# Altium PCB Analog temperature sensor.PcbDoc
Units mil, origin at the board's own origin, x right, y up, seen from the top; angles counter-clockwise.
Board outline 2560 x 1975 mil, 2 copper layers (Top Layer, Bottom Layer); 17 components, 13 nets, 51 pads, 6 vias.
Unrouted connection lines stored in the file: 9.
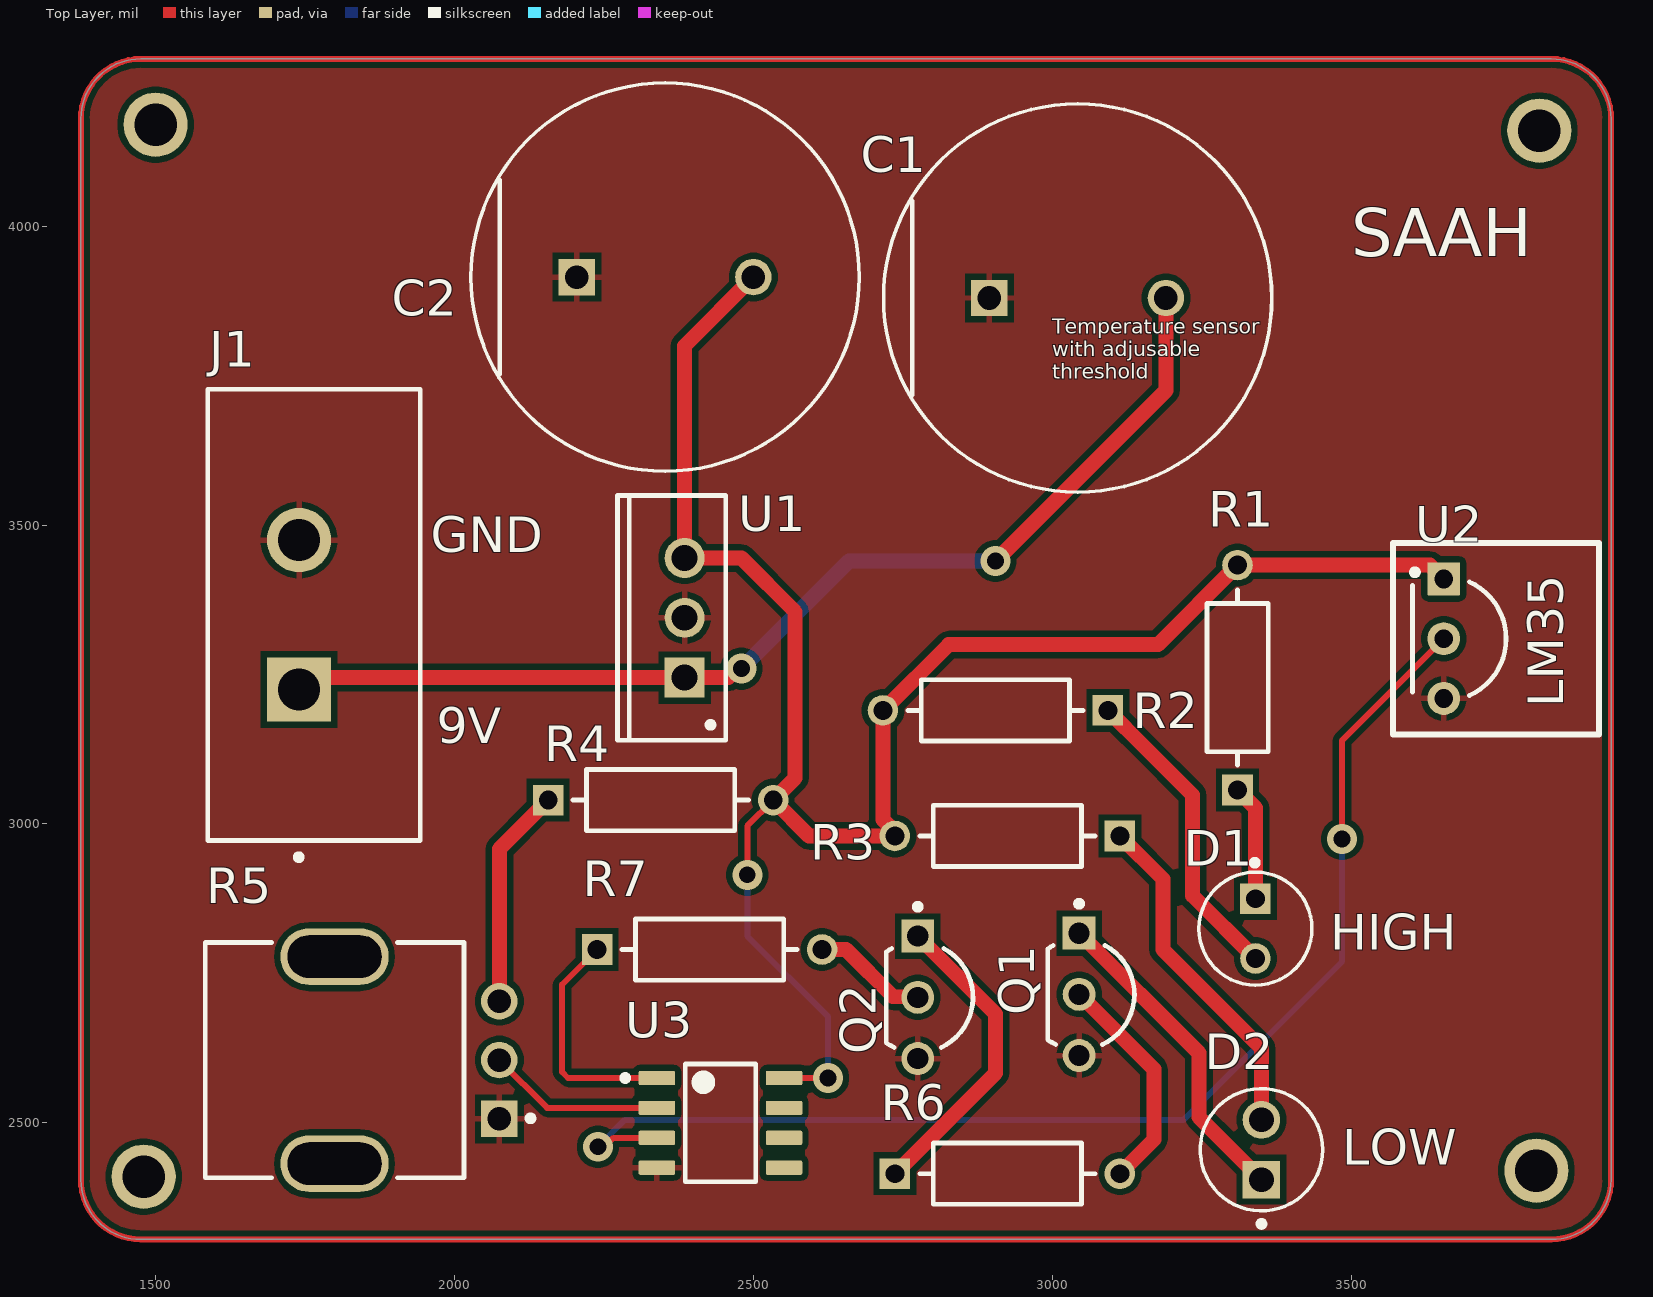
[diagram p0: Top Layer view]
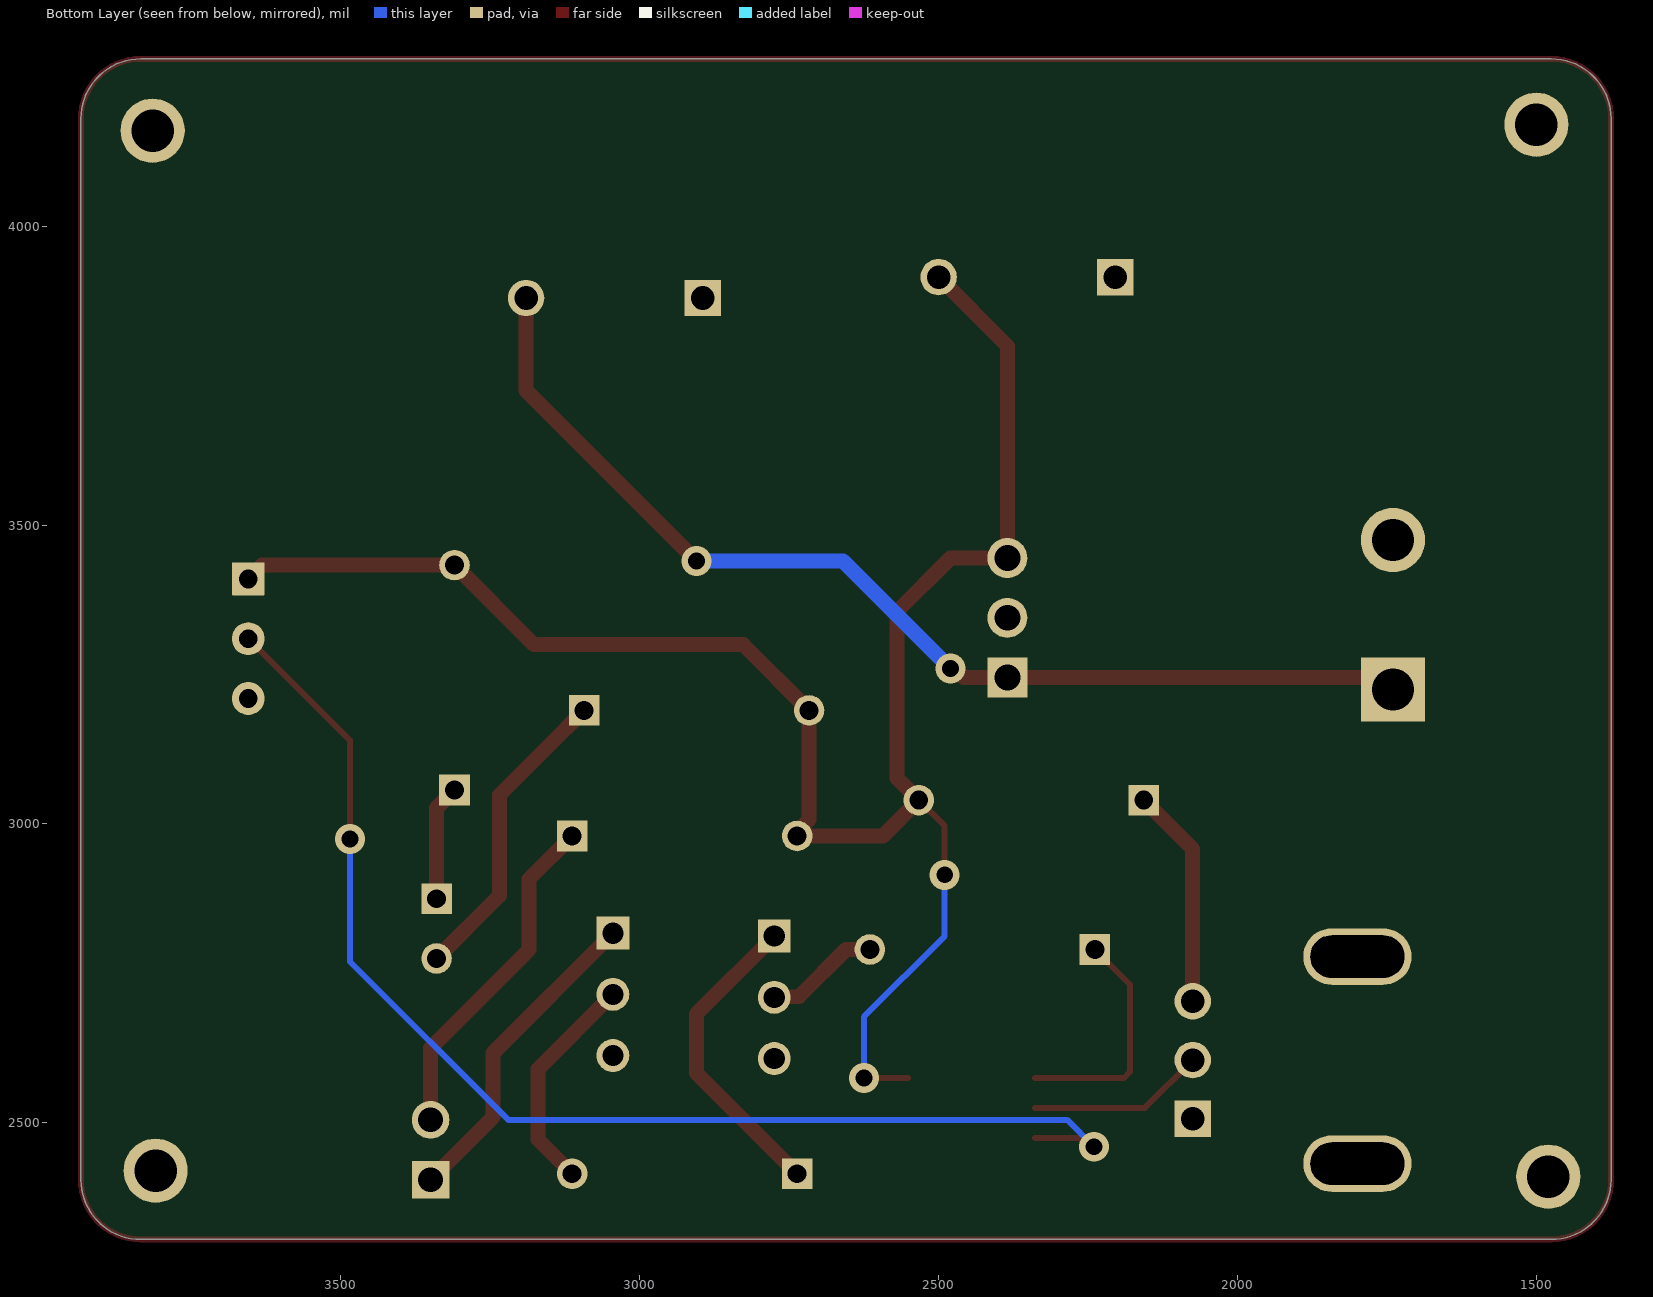
[diagram p1: Bottom Layer view, seen from below]
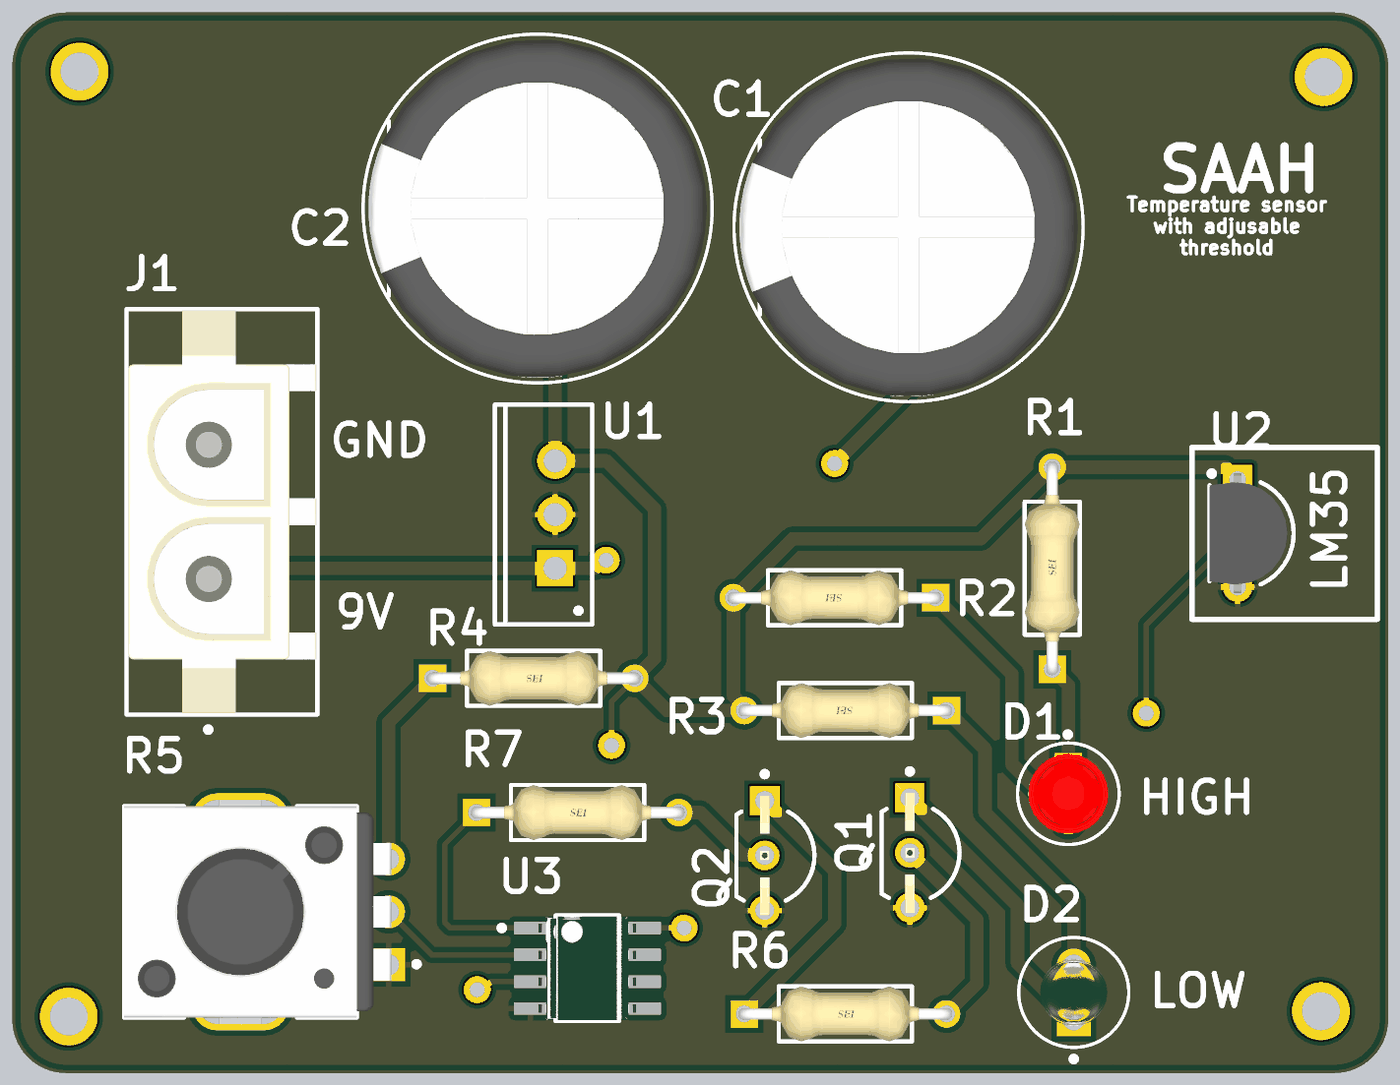
[diagram p2: 3D render of the assembled board from above, using the file's embedded part models]

## Layer stack, top to bottom
Top Solder: solder mask 0.4, Solder Resist, Dk 3.5
Top Layer: signal copper 1.4
Dielectric 1: dielectric 12.6, FR-4, Dk 4.8
Bottom Layer: signal copper 1.4
Bottom Solder: solder mask 0.4, Solder Resist, Dk 3.5

## Board outline
1375,2405 1375,4180 cw(c1475,4180) 1475,4280 3835,4280 cw(c3835,4180) 3935,4180 3935,2405 cw(c3835,2405) 3835,2305 1475,2305 cw(c1475,2405)

## Design rules (kind name [scope] priority, off if disabled: settings)
Clearance [All] p1: gap=10 ignorepadtopadclearanceinfootprint=FALSE
PolygonConnect [All] p1: connectstyle=Relief reliefconductorwidth=10 reliefentries=4 polygonreliefangle="90 Angle" airgapwidth=10
RoutingVias [All] p1: holewidth=28 width=50 viastyle="Through Hole" minholewidth=28 minwidth=50 maxholewidth=28 maxwidth=50
SolderMaskExpansion [All] p1: expansion=4 istentingtop=FALSE
SupplyNets "Schematic Supply Nets_1" [InNet('VCC')] p1: voltage=0.000
SupplyNets "Schematic Supply Nets" [InNet('GND')] p2: voltage=0.000
Width [All] p1: maxlimit=30 minlimit=10 preferedwidth=10 minimp=50.000000 maximp=50.000000 favimp=50.000000
30 further rules are at their usual default settings.

## Components (designator, comment, footprint, x,y, rotation, side; value= is the part's Value field where it differs from the comment)
C1 "0.33uF" FP-RAD-TH-D_16_0_5-L_25_2-MFG 3042.64,3880 r0 top
C2 "0.1uF" FP-RAD-TH-D_16_0_5-L_25_2-MFG 2352.36,3915 r0 top
D1 "LTL-1CHEE" FP-LTL-1CHEE-MFG 3340,2825 r270 top
D2 "TLLG4400" FP-6_544-5255_01-4-MFG 3350,2455 r90 top
J1 "350428-1" FP-350428-1-MFG 1765,3350 r90 top
Q1 "BC547BRL1G" ONSC-TO-92-3-29-11_AM_BL 3045,2715 r270 top
Q2 "BC547BRL1G" ONSC-TO-92-3-29-11_AM_BL 2775,2710 r270 top
R1 "1k" FP-CF14-MFG 3310,3245 r90 top
R2 "1k" FP-CF14-MFG 2905,3190 r180 top
R3 "1k" FP-CF14-MFG 2925,2980 r180 top
R4 "10k" FP-CF14-MFG 2345,3040 r0 top
R5 "PTV09A-4225F-B103" FP-PTV09A-4-MFG 1799.41,2605 r90 top
R6 "10k" FP-CF14-MFG 2925,2415 r0 top
R7 "10k" FP-CF14-MFG 2426.81,2790 r0 top
U1 "L7805CV" TO220 2385,3345 r90 top
U2 "LM35CAZ/NOPB" LP0003A 3655,3310 r0 top
U3 "LM358DR" FP-D0008A-MFG 2445,2500 r0 top

## Footprints (in the part's own frame and the unit in brackets; to place one, negate y for a bottom-side part, rotate by r counter-clockwise, add the part's x,y. Pads: shape width x height; smd on the part's side, far side on the other; paste and mask are expansions set on the pad)
FP-6_544-5255_01-4-MFG [mm]
  rect 1.6x1.6 hole 1.05 paste-2539.97 mask+0: 1(-1.27,0)
  round 1.6 hole 1.05 paste-2539.97 mask+0: 2(1.27,0)
  silkscreen extent -3.27,-2.6 2.6,2.6, body extent -2.32,-2.32 2.32,2.32, height 0.25
FP-350428-1-MFG [mm]
  rect 2.73x2.73 hole 1.78 paste-2539.97 mask+0: 1(-3.175,0.635)
  round 2.73 hole 1.78 paste-2539.97 mask+0: 2(3.175,0.635)
  silkscreen extent -10.42,-4.51 9.59,4.51, body extent -9.69,-4.61 9.69,4.61, height 0.25
FP-CF14-MFG [mm]
  rect 1.3x1.3 hole 0.8 paste-2539.97 mask+0: 1(-4.78,0)
  round 1.3 hole 0.8 paste-2539.97 mask+0: 2(4.78,0)
  silkscreen extent -3.73,-1.3 3.73,1.3, body extent -5.53,-1.4 5.53,1.4, height 0.25
FP-D0008A-MFG [mm]
  rrect17% 1.55x0.6 smd paste+0 mask+0: 1(-2.7,1.905) 2(-2.7,0.635) 3(-2.7,-0.635) 4(-2.7,-1.905) 5(2.7,-1.905) 6(2.7,-0.635) 7(2.7,0.635) 8(2.7,1.905)
  silkscreen extent -4.17,-2.5 1.5,2.5, body extent -3.57,-2.75 3.57,2.75, height 0.25
FP-LTL-1CHEE-MFG [mm]
  rect 1.3x1.3 hole 0.8 paste-2539.97 mask+0: 1(-1.27,0)
  round 1.3 hole 0.8 paste-2539.97 mask+0: 2(1.27,0)
  silkscreen extent -2.92,-2.4 2.4,2.4, body extent -2.15,-2.15 2.15,2.15, height 0.25
FP-PTV09A-4-MFG [mm]
  rect 1.55x1.55 hole 1 paste-2539.97 mask+0: 1(-2.5,-7)
  round 1.55 hole 1 paste-2539.97 mask+0: 2(0,-7) 3(2.5,-7)
  rrect100% 2.4x4.6 hole 4 slot 1.8 at 0 deg paste-2539.97 mask+0: 4(-4.4,0) 5(4.4,0)
  silkscreen extent -5,-8.45 5,5.5, body extent -5.8,-7.88 5.8,5.6, height 0.25
FP-RAD-TH-D_16_0_5-L_25_2-MFG [mm]
  rect 1.55x1.55 hole 1 paste-2539.97 mask+0: 1(-3.75,0)
  round 1.55 hole 1 paste-2539.97 mask+0: 2(3.75,0)
  silkscreen extent -8.25,-8.25 8.25,8.25, body extent -8.35,-8.35 8.35,8.35, height 0.25
LP0003A [mm] "TO, Flat Index; 3 In-Line, Formed Axial Leads; Body Dia. 4.8mm; Leads 0.56 x 0.41 mm (max)"
  rrect7% 1.4x1.4 hole 0.8: 1(0,2.54)
  round 1.4 hole 0.8: 2(0,0) 3(0,-2.54)
  silkscreen extent -1.35,-2.41 2.65,2.95, body extent -1.33,-2.83 2.35,2.83, height 9.01
ONSC-TO-92-3-29-11_AM_BL [mm] "TO, 3-Leads, Body Dia 4.7mm, Pitch 2.6mm"
  rect 1.4x1.4 hole 0.9: 1(-2.6,0)
  round 1.4 hole 0.9: 2(0,0) 3(2.6,0)
  silkscreen extent -3.97,-1.34 2.13,2.35, body extent -2.84,-1.34 2.84,2.35, height 5.33
TO220 [mm] "TO, Thru-Hole, Vertical, Heatsink Mounted; 3 In-Line Leads; Pitch 2.54 mm"
  rect 1.7x1.7 hole 1.1: 1(-2.54,0)
  round 1.7 hole 1.1: 2(0,0) 3(2.54,0)
  silkscreen extent -5.2,-1.75 5.2,2.85, body extent -5.25,-1.8 5.25,2.9, height 19.7

## Part data
C1 C2: library part CMP-05427-001116-1, "Aluminum Electrolytic Capacitors (Radial Lead Type) 47uF ±20% 400V", Capacitance=47uF, Case/Package=Radial, Dielectric Material=Aluminium, Leakage Current=1.138mA, Max Operating Temperature=105°C, Min Operating Temperature=-25°C, Package Quantity=100, Ripple Current=1.18A, Tolerance=20%, Voltage=400V, Construction=RADIAL, Diameter=16mm, Dissipation Factor=0.24%, Height=25mm, Height - Seated (Max)=0.984inch, Lead Diameter=0.8mm, Lead Free="Lead Free", Lead Pitch=7.5mm, Length=25mm, Life (Hours)=10000Hour, Mount="Through Hole", Number of Pins=2, Packaging=Bulk, Radiation Hardening=No, REACH SVHC="No SVHC", Ripple Current (AC)=1.18A, RoHS Compliant=Yes, Series=EE, Termination=Radial, Voltage Rating=400V, Voltage Rating (DC)=400V
D1: library part CMP-22017-000040-1, "LED RED CLEAR T/H", Case/Package=T, Color=Red, Forward Current=30mA, Forward Voltage=2V, Max Operating Temperature=100°C, Max Power Dissipation=100mW, Min Operating Temperature=-55°C, Package Quantity=1000, Reverse Voltage=5V, Test Current=10mA, Depth=3.8mm, Diameter=3.1mm, Dominant Wavelength=625nm, Height=5.2mm, Illumination Color=Red, Lead Free="Lead Free", Length=3.8mm, Lens Color=Red, Lens Style=Dome, Lens Transparency=Clear, Luminous Intensity=19mcd, Mount="Through Hole", Number of Elements=1, Number of LEDs=1, Number of Pins=2, Packaging=Bulk, Power Dissipation=100mW, Radiation Hardening=No, RoHS Compliant=Yes, Series=-, Viewing Angle=45°, Wavelength=635nm, Width=3.8mm
D2: library part CMP-00030-55433990-1, "TLLG4400 Led, Pcb, Green, 0.63MCD, 3MM, T-1, 7MA, 1.9V, 565NM, 25DEG, 20V, 20MW, -40", Case/Package=T, Color=Green, Forward Current=2mA, Forward Voltage=1.9V, Max Operating Temperature=100°C, Max Power Dissipation=20mW, Min Operating Temperature=-40°C, Reverse Voltage=20V, Voltage Rating (DC)=2.4V, Depth=3.2mm, Dominant Wavelength=575nm, Height=4.5mm, Illumination Color=Green, Length=3.2mm, Lens Color=Green, Lens Size=3mm, Lens Style="Circular, Colored, Diffused, Dome, Round", Lens Transparency=Diffused, Luminous Intensity=1.2mcd, Mount="Through Hole", NexarPartId=55433990, Number of Elements=1, Number of LEDs=1, Number of Pins=2, Power Dissipation=20mW, Radiation Hardening=No, REACH SVHC=Unknown, RoHS=Compliant, Schedule B="8541402000, 8541402000", Test Current=2mA, Viewing Angle=50°, Wavelength=575nm
J1: library part CMP-03369-000080-1, "CONN HEADER VERT 2POS 6.35MM", Current Rating=12A, Manufacturer="TE Connectivity", Temperature="-40°C to +105°C", Temperature Range High=+105°C, Temperature Range Low=-40°C, Voltage Rating=600V, Automotive=No, Category=Conn, ComponentLink2Description=Datasheet, ComponentLink2URL=https://www.te.com/commerce/DocumentDelivery/DDEController?Action=showdoc&DocId=Customer+Drawing%7F350428%7FY2%7Fpdf%7FEnglish%7FENG_CD_350428_Y2.pdf%7F350428-1, Conn Gender=Male, Conn Orientation=Vertical, Contact Material=Gold,Nickel, Device Class L1=Connectors, Device Class L2="Headers and Wire Housings", Device Class L3=unset, Digikey Description="CONN HEADER VERT 2POS 6.35MM", Height=14.99mm, Lead Free=Yes, Manufacturer Part Number=350428-1, Mouser Description="Connector, Soft Shell; Universal MATE-N-LOK; 2; Nylon; Natural; 19 A; 600 VAC", Number Of Contacts=2, Number Of Rows=1, Octopart=https://octopart.com/350428-1-te+connectivity-46505355, Package=350428-1, Pitch=6.35mm, RoHS=TRUE, Standoff Height=0.63mm
Q1 Q2: library part CMP-1048-01605-1, "Amplifier Transistor, NPN Silicon, 3-Pin TO-92, Pb-Free, Tape and Reel", Manufacturer="On Semiconductor", ComponentLink1Description="Manufacturer URL", ComponentLink1URL=http://www.onsemi.com/, ComponentLink2Description=Datasheet, ComponentLink2URL=http://www.onsemi.com/pub_link/Collateral/BC546-D.PDF, ComponentLink3Description="Package Specification", ComponentLink3URL=http://www.onsemi.com/pub_link/Collateral/MAC97-D.PDF, DatasheetVersion="Rev. 7", fT Min (MHz)=150, IC Continuous (A)=0.1, Mounting Technology="Through Hole", PackageDescription="3-Pin Transistor Outline, Body 4.825 x 3.685 mm, Pitch 1.27 mm", PackageReference=TO-92-3-29-11_AM_BL, PackageVersion="Rev. AM", Packing="Tape and Reel", PartNumber=BC547BRL1G, Polarity=NPN, RoHS=TRUE
R1 R2 R3 R4 R6 R7: library part CMP-26528-000003-1, "RES 7.5K OHM 1/4W 5% AXIAL", Case/Package=Axial, Max Operating Temperature=155°C, Max Power Dissipation=250mW, Min Operating Temperature=-55°C, Resistance=7.5kR, Resistor Type="Carbon Film", Temperature Coefficient=-400ppm/°C, Tolerance=5%, Contact Plating=Tin, Diameter=2.3mm, Features="Flame Retardant Coating", Lead Free="Lead Free", Length=0.256inch, Mount="Through Hole", Number of Terminations=2, Packaging="Tape and Reel", Power Rating=250mW, Radiation Hardening=No, RoHS Compliant=Yes, Series=CF
R5: library part CMP-07234-000052-1, "POT 10K OHM 1/20W CARBON LINEAR", Max Operating Temperature=50°C, Max Power Dissipation=50mW, Min Operating Temperature=-10°C, Package Quantity=100, Resistance=10kR, Resistance Tolerance=20%, Resistor Type=Carbon, Actuator Diameter=0.236inch, Actuator Length=0.984inch, Depth=12.5mm, Height=12.5mm, Hole Diameter=9.1mm, Length=11.4mm, Military Standard=Not, Mount="Through Hole", Number of Gangs=1, Number of Turns=1, Packaging=Bulk, Power Rating=50mW, Radiation Hardening=No, REACH SVHC="No SVHC", RoHS Compliant=Yes, Series="Pro Audio PTV09", Taper=Linear, Technology="CARBON FILM", Termination=PCB, Tolerance=20%, Type=Potentiometer
U1: library part CMP-0244-00483-1, "Positive Voltage Regulator, 5V, 3-Pin TO-220", ComponentLink1Description="Manufacturer URL", ComponentLink1URL=http://www.st.com, ComponentLink2Description=Datasheet, ComponentLink2URL=http://www.st.com/internet/com/TECHNICAL_RESOURCES/TECHNICAL_LITERATURE/DATASHEET/CD00000444.pdf, ComponentLink3Description="Package Specification", ComponentLink3URL=http://www.st.com/internet/com/TECHNICAL_RESOURCES/TECHNICAL_LITERATURE/PACKAGE_INFORMATION/CD00004649.pdf, DatasheetVersion=16/11/2011, PackageDescription="TO, Thru-Hole, Vertical, Heatsink Mounted; 3 In-Line Leads; Pitch 2.54 mm", PackageReference=TO220, PackageVersion=ver3.0
U2: library part CMP-0066-00028-3, "Precision Centigrade Temperature Sensor, 3-pin TO-92, Pb-Free", Manufacturer="Texas Instruments", PackageTopMarking=NSXYTT*LM35*CAZ, PowerWise=N, Code_JEDEC=TO-226-AA, ComponentLink1Description="Datasheet URL", ComponentLink1URL=http://www.ti.com/general/docs/lit/getliterature.tsp?genericPartNumber=LM35&fileType=pdf, CompType="Temp Sensor IC", PackageDescription="TO-92, Molded, 3 Lead", PackageReference=LP0003A, PinCount=3, RoHS=Y
U3: library part CMP-1685-00009-2, "IC OPAMP GP 2 CIRCUIT 8SOIC", Case/Package=SOIC, Dual Supply Voltage=9V, Input Bias Current=250nA, Input Offset Voltage (Vos)=7mV, Max Dual Supply Voltage=16V, Max Operating Temperature=70°C, Max Supply Voltage=32V, Min Dual Supply Voltage=1.5V, Min Operating Temperature=0°C, Min Supply Voltage=3V, Nominal Supply Current=1.2mA, Operating Supply Current=1mA, Output Current=30mA, Package Quantity=2500, Power Supply Rejection Ratio (PSRR)=65dB, Voltage Gain=100dB, Bandwidth=700kHz, Common Mode Rejection Ratio=65dB, Contact Plating=Gold, Gain Bandwidth Product=700kHz, Height=1.58mm, Lead Free="Lead Free", Length=4.9mm, Mount="Surface Mount", Number of Amplifiers=2, Number of Channels=2, Number Of Circuits=2, Number of Elements=2, Number of Pins=8, Operating Supply Voltage=16V, Output Current per Channel=30mA, Packaging="Tape and Reel", Radiation Hardening=No, REACH SVHC="No SVHC", Slew Rate=0.3V/µs, Unity Gain Bandwidth Product=700kHz, Width=3.91mm

## Free pads (board coordinates)
  round 107.48 hole 70.71: 2(1500,4170) 3(3815,4160) 4(3810,2420) 5(1480,2410)

## Via types
v1: diameter 50, hole 28, Top Layer to Bottom Layer, 6 vias

## Nets (pads, with @x,y where several pads share a name; then routed paths per layer and width w, separated by ;. In a path a pad name is that pad's centre, name@x,y a point inside that pad or via, vN(x,y) a via of type N, cw(c..) or ccw(c..) an arc to the next point about the centre after c; other vN are vias at no path point)
GND: C1.1 C2.1 J1.2 Q1.3 Q2.3 R5.1 U1.2 U2.3 U3.4
NetC2_2: C2.2 R1.2 R2.2 R3.2 R4.2 U1.3 U2.1 U3.8 | length 3178
  Top Layer w10: v1(2490,2915) 2490,2996.81 R4.2 ; U3.8 v1(2625,2575)
  Top Layer w25: C2.2 2385,3800 U1.3 2480,3445 2570,3355 2570,3076.81 R4.2 2593.19,2980 R3.2 2736.81,2987.08 2716.81,3007.08 R2.2 2826.81,3300 3176.81,3300 R1.2 3631.81,3433.19 U2.1
  Bottom Layer w10: v1(2490,2915) 2490,2812.5 2625,2677.5 v1(2625,2575)
NetD1_1: D1.1 Q2.1 R1.1 R6.1 | length 715.1
  Top Layer w25: R6.1 2905,2583.19 2905,2682.36 Q2.1 ; R1.1 3340,3026.81 D1.1
NetD1_2: D1.2 R2.1 | length 517.2
  Top Layer w25: R2.1 3154.73,3128.45 3235,3048.19 3235,2880 D1.2
NetD2_1: D2.1 Q1.1 | length 538.7
  Top Layer w25: Q1.1 3245.5,2616.86 3245.5,2509.5 D2.1
NetD2_2: D2.2 R3.1 | length 573.1
  Top Layer w25: R3.1 3185,2908.19 3185,2790 3350,2625 D2.2
NetQ1_2: Q1.2 R6.2 | length 375.3
  Top Layer w25: Q1.2 3170,2590 3170,2471.81 R6.2
NetQ2_2: Q2.2 R7.2 | length 193.1
  Top Layer w25: R7.2 2655,2790 2734,2711 2774,2711 Q2.2
NetR4_1: R4.1 R5.3 | length 370.5
  Top Layer w25: R5.3 2075,2958.19 R4.1
NetR5_2: R5.2 U3.2 | length 296.8
  Top Layer w10: R5.2 2155,2525 U3.2
NetR7_1: R7.1 U3.1 | length 392.1
  Top Layer w10: R7.1 2180,2731.38 2180,2585 2190,2575 U3.1
NetU2_2: U2.2 U3.3 | length 2099.6
  Top Layer w10: v1(2240,2460) 2250.82,2460 2265.82,2475 U3.3 ; v1@3495.82,2975 v1(3485,2975) 3485,3140 U2.2
  Bottom Layer w10: v1(2240,2460) 2285,2505 3220,2505 3485,2770 v1(3485,2975)
VCC: C1.2 J1.1 U1.1 | length 1812.2
  Top Layer w25: J1.1 1760,3245 U1.1 2458.24,3245 2473.24,3260 v1(2480,3260) ; v1(2905,3440) 3190.28,3725.28 C1.2
  Bottom Layer w25: v1(2480,3260) 2660,3440 v1(2905,3440)
pads on no net: R5.4 R5.5 U3.5 U3.6 U3.7
copper on no net: | length 8898.3
  Top Layer w10: 1375,2405 ccw(c1475,2405) 1475,2305 3835,2305 ccw(c3835,2405) 3935,2405 3935,4180 ccw(c3835,4180) 3835,4280 1475,4280 ccw(c1475,4180) 1375,4180 1375,2405

## Polygon pours and split planes (outlines as drawn)
GND on Top Layer "GND_L01_P000" (solid, pour order 0): 1375,2405 1375,4180 cw(c1475,4180) 1475,4280 3835,4280 cw(c3835,4180) 3935,4180 3935,2405 cw(c3835,2405) 3835,2305 1475,2305 cw(c1475,2405)

## Silkscreen, mask and mechanical layers (free items; w line width, h text height)
Top Overlay:
  lines w10: 3570,3150 3915,3150 3915,3470 3570,3470 3570,3150
  text "SAAH" at 3500,3950 h80
  text "Temperature sensor / with adjusable  / threshold" at 3000.2,3745 h25
  text "GND" at 1960,3455 h60
  text "LM35" at 3855,3195 h60 r90
  text "9V" at 1970,3135 h60
  text "HIGH" at 3465,2790 h60
  text "LOW" at 3485,2430 h60